# Allegro board QNET1.brd
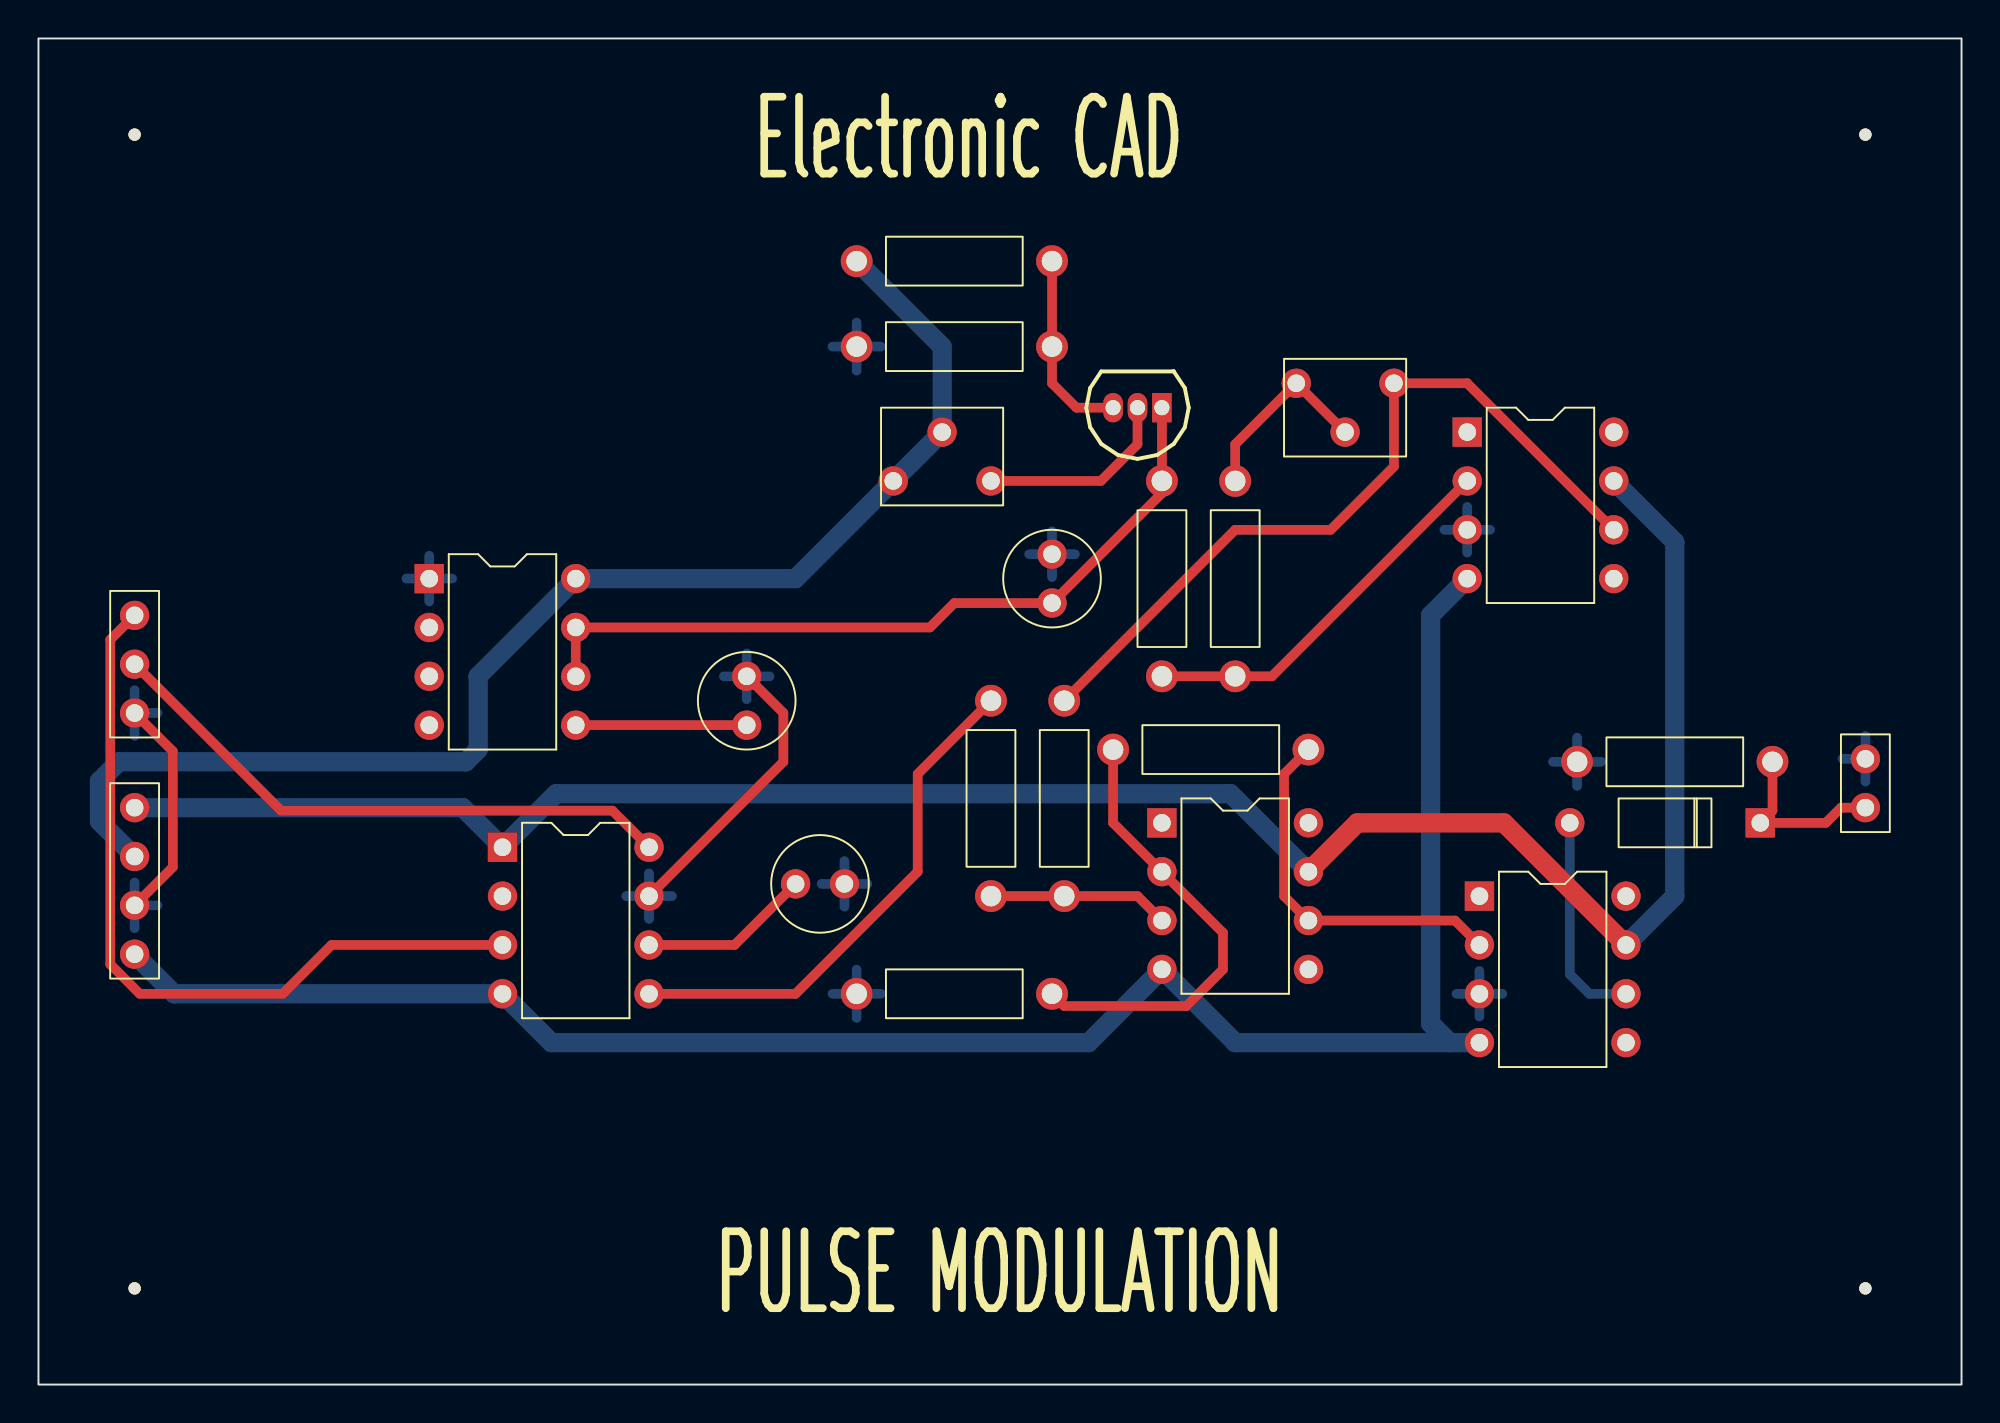
[diagram p0: board, top side]
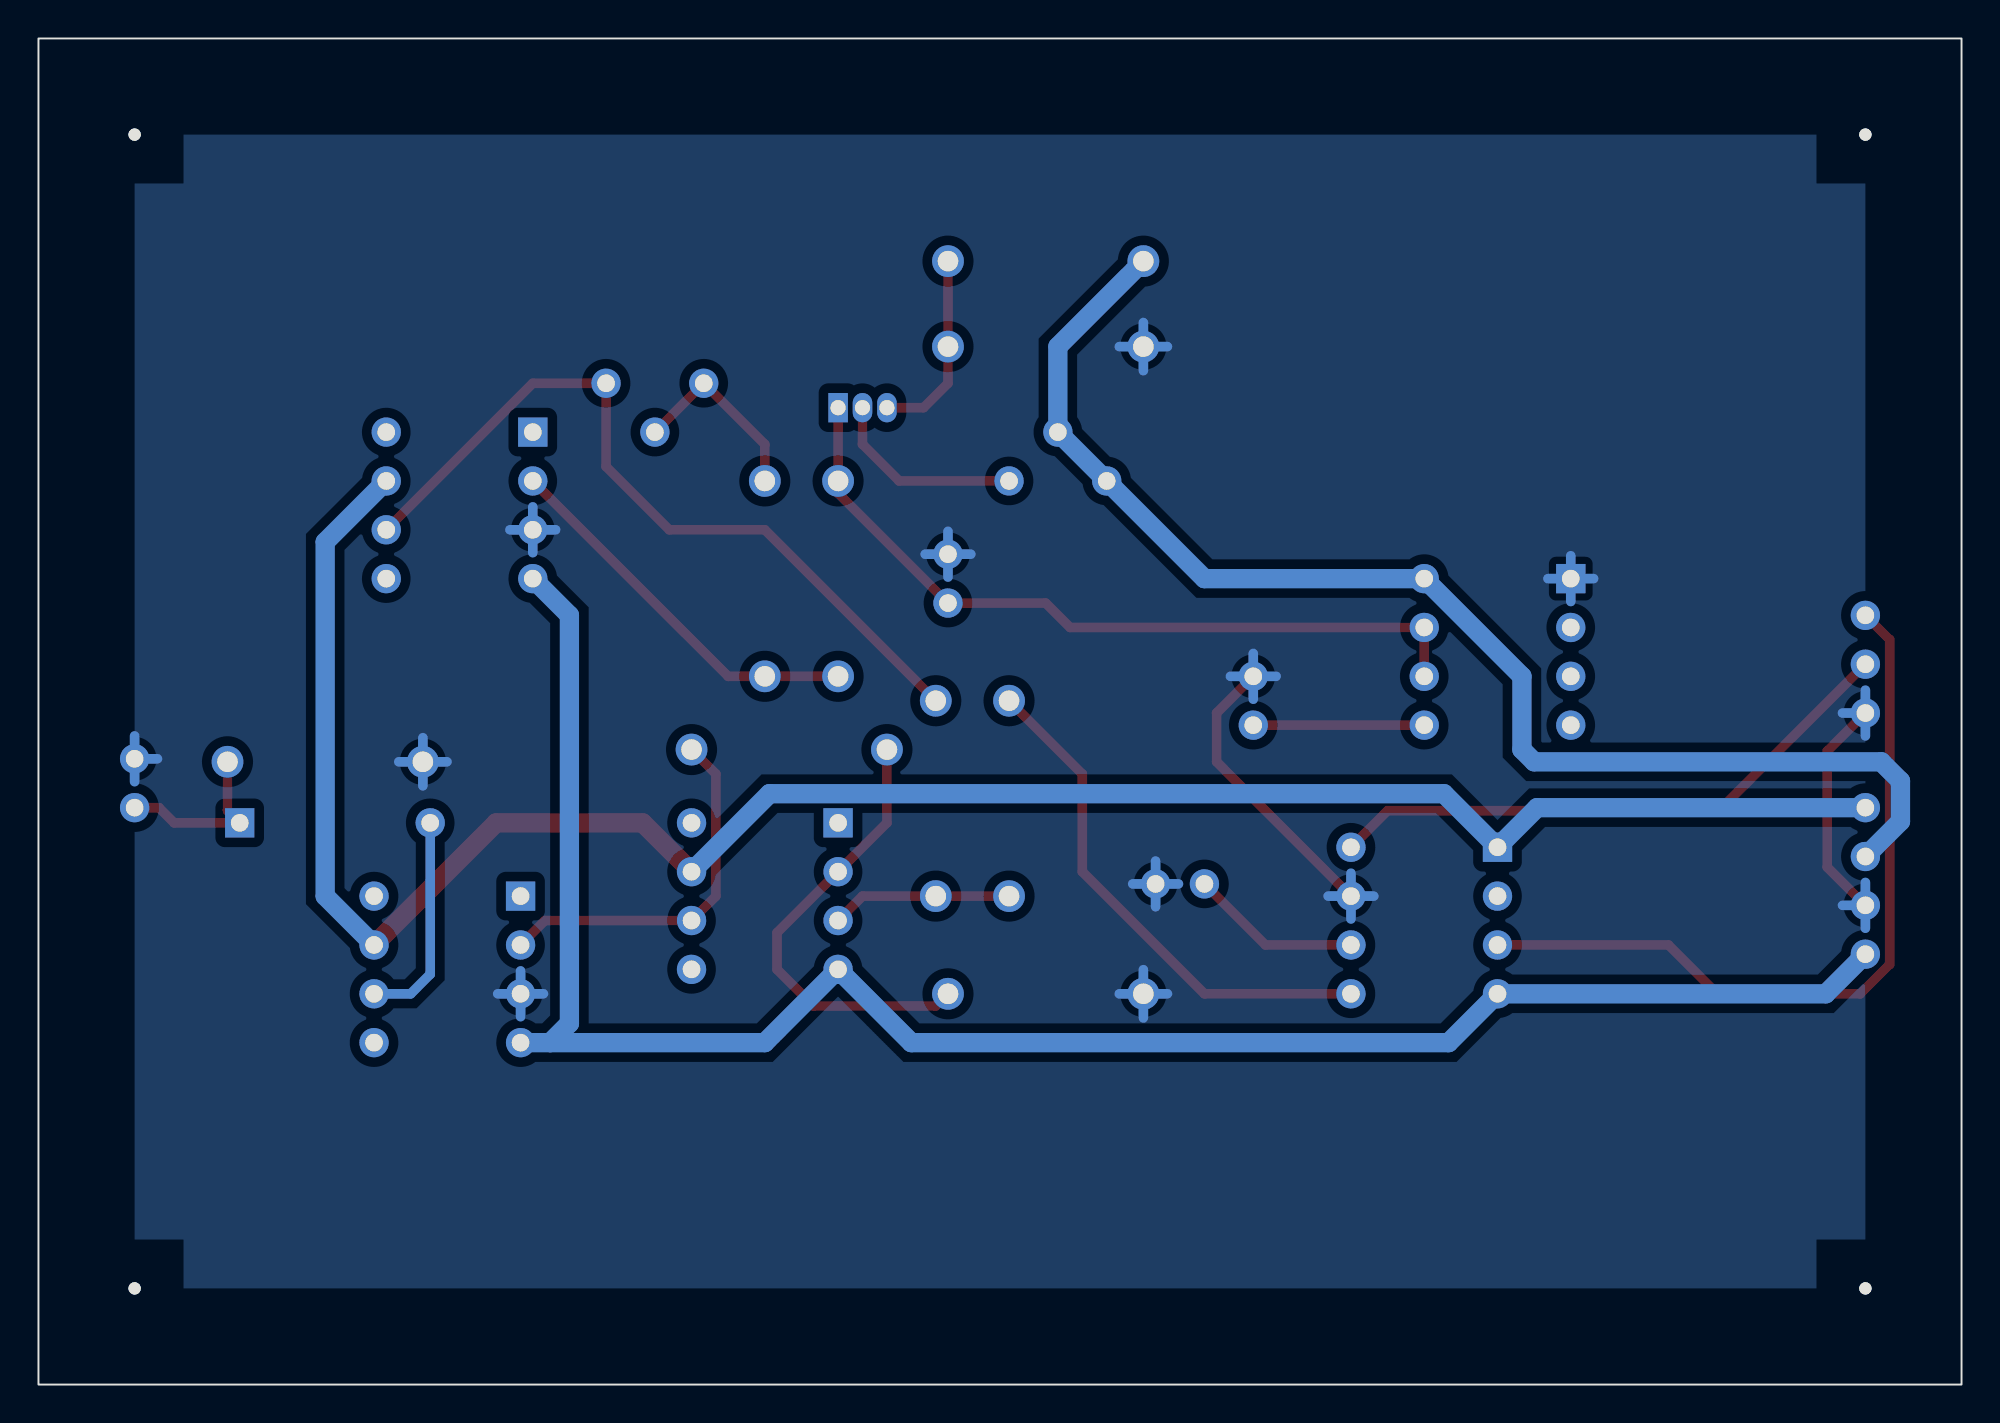
[diagram p1: board, bottom side, seen from below]

Outline 100 x 70 mm; copper layers: TOP, BOTTOM. Coordinates in mm from the lower left corner of the outline.
Outline path: rectangle 0,0 100,70

## Design rules (mm)
constraint set DEFAULT: min track width 0.5
nets with their own width: min track width 1; nets +5V +15V -15V

## Placement (name value [footprint] x y rotation side)
C1  0.01uF  [CAP196]  52.7 40.64 0 top
C2  0.01uF  [CAP196]  36.83 34.29 0 top
C3  0.01uF  [CAP196]  39.37 26.04 270 top
D1  DIODE  [DO41]  89.53 29.21 90 top
J1  CON4  [JUMPER4]  5 30 270 top
J2  CON3  [JUMPER3]  5 40 270 top
J3  CON2  [JUMPER2]  95 30 90 top
NOREF  -  [unnamed]  5 5 0 top
NOREF#2  -  [#2]  -1 0 90 top
NOREF#3  -  [#2]  100 0 90 top
NOREF#4  -  [#2]  0 71 0 top
NOREF#5  -  [unnamed]  5 65 0 top
NOREF#6  -  [unnamed]  95 5 0 top
NOREF#7  -  [unnamed]  95 65 0 top
Q1  2SA1020  [TO92]  58.42 50.8 180 top
R1  560  [RES400]  62.23 36.83 0 top
R2  39K  [RES400]  42.55 58.42 270 top
R3  6.2K  [RES400]  58.42 46.99 180 top
R4  100K  [RES400]  52.7 53.98 90 top
R5  10K  [RES400]  53.34 35.56 180 top
R6  10K  [RES400]  55.88 33.02 270 top
R7  10K  [RES400]  49.53 35.56 180 top
R8  10K  [RES400]  52.7 20.32 90 top
R9  10K  [RES400]  90.17 32.38 90 top
U1  NE555  [DIP8_3]  20.32 41.91 0 top
U2  LF356  [DIP8_3]  74.3 49.53 0 top
U3  LF398  [DIP8_3]  24.13 27.94 0 top
U4  LF356  [DIP8_3]  58.42 29.21 0 top
U5  LF356  [DIP8_3]  74.93 25.4 0 top
VR1  5K  [RESADJ]  49.53 46.99 270 top
VR2  20K  [RESADJ]  65.41 52.07 90 top

## Library data of the parts
C1-C3 = CAP NP: Tolerance: ***; User Part Number: ***
D1 = DIODE
J1 = CON4: User Part Number: ***
J2 = CON3: User Part Number: ***
J3 = CON2: User Part Number: ***
Q1 = 2SA1020
R1-R9 = R: Tolerance: ***; User Part Number: ***
U1 = NE555_6: Tolerance: ***; User Part Number: ***
U2 U4 U5 = LF356_0: Tolerance: ***; User Part Number: ***
U3 = LF398_0: Tolerance: ***; User Part Number: ***
VR1 VR2 = POT: Tolerance: ***; User Part Number: ***

## Footprints (pads in the part's own frame, mm; a bottom-side part is the same pattern mirrored in y, then rotated)
CAP196
  round 1.524 hole 0.914: 1(0,0) 2(0,2.54)
DIP8_3
  rect 1.524x1.524 hole 0.914: 1(0,0)
  round 1.524 hole 0.914: 2(0,-2.54) 3(0,-5.08) 4(0,-7.62) 5(7.62,-7.62) 6(7.62,-5.08) 7(7.62,-2.54) 8(7.62,0)
DO41
  rect 1.524x1.524 hole 0.914: 1(0,0)
  round 1.524 hole 0.914: 2(0,9.906)
JUMPER2
  round 1.524 hole 0.914: 1(0,0) 2(2.54,0)
JUMPER3
  round 1.524 hole 0.914: 1(0,0) 2(2.54,0) 3(5.08,0)
JUMPER4
  round 1.524 hole 0.914: 1(0,0) 2(2.54,0) 3(5.08,0) 4(7.62,0)
RES400
  round 1.651 hole 1.067: 1(0,0) 2(0,10.16)
RESADJ
  round 1.524 hole 0.914: 1(0,0) 2(-2.54,-2.54) 3(0,-5.08)
TO92
  rect 1.016x1.524 hole 0.787: 1(0,0)
  oval 1.016x1.524 hole 0.787: 2(1.27,0) 3(2.54,0)
unnamed
  round 0.635 hole 3.175 unplated: (0,0)

## Nets
+5V: J1.2 R2.1 U1.8(VCC) VR1.2(WIPER) VR1.3
+15V: J1.1 U2.7 U3.1 U4.7 U5.7
-15V: J1.4 U2.4(V-) U3.4(V-) U4.4(V-) U5.4(V-)
GND: C1.2 C2.2 C3.2 J1.3 J2.3 J3.2 R4.2 R8.2 R9.2 U1.1 U2.3 U3.7 U5.3
CLOCK: U1.2
SIG_1: R5.1 U2.6 VR2.3
N01013: C1.1 Q1.1(E) R3.1 U1.6 U1.7
N01032: C2.1 U1.5
N01351: Q1.3 R2.2 R4.1
N01724: R1.1 R3.2 U2.2
N02864: J2.1 U3.3
N02879: J2.2 U3.8
N03045: C3.1 U3.6
N03266: R7.1 U3.5
N03270: R5.2 R7.2 U4.3
N03305: R6.1 R8.1 U4.2
N03554: R6.2 U4.6 U5.2
N03734: D1.2 U5.6
N03738: D1.1(K) J3.1 R9.1
N04124: Q1.2 VR1.1
N04258: R1.2 VR2.1 VR2.2(WIPER)

Pads without a net: U1 3 4; U2 1 5 8; U3 2; U4 1 5 8; U5 1 5 8

## Routing (per net, layer and track width the routed paths; a pad name or vN(x,y) marks a point on that pad's centre or on a via; arc(x,y) is an arc through that point)
+5V: length 69
  BOTTOM w1: R2.1 46.99,53.98 VR1.2 VR1.3 39.37,41.91 U1.8 22.86,36.83 22.86,33.02 22.23,32.38 4.17,32.38 3.17,31.39 3.17,29.29 J1.2
+15V: length 111.4
  TOP w1: U4.7 68.58,29.21 76.2,29.21 U5.7
  BOTTOM w1: U2.7 85.09,43.81 85.09,25.4 U5.7 ; J1.1 22.07,30 U3.1 26.92,30.73 61.98,30.73 U4.7
-15V: length 100.3
  BOTTOM w1: J1.4 7.06,20.32 U3.4 26.67,17.78 54.61,17.78 U4.4 62.23,17.78 73.39,17.78 ; U5.4 73.39,17.78 ; 73.39,17.78 72.39,18.78 72.39,40.01 U2.4
GND: length 85.7
  TOP w0.5: U3.7 38.73,32.38 38.73,34.92 C2.2 ; J1.3 6.99,26.91 6.99,32.94 J2.3
  BOTTOM w0.5: 73.11,44.45 U2.3 ; U2.3 74.3,43.26 ; U2.3 75.48,44.45 ; U2.3 74.3,45.64 ; 42.55,19.07 R8.2 ; R8.2 42.55,21.57 ; R8.2 41.29,20.32 ; R8.2 43.8,20.32 ; 73.74,20.32 U5.3 ; U5.3 74.93,21.51 ; U5.3 76.12,20.32 ; U5.3 74.93,19.13 ; J2.3 6.19,34.92 ; J2.3 5,36.11 ; J2.3 5,33.73 ; C2.2 38.02,36.83 ; C2.2 36.83,38.02 ; C2.2 36.83,35.64 ; C2.2 35.64,36.83 ; 41.29,53.98 R4.2 ; R4.2 42.55,52.72 ; R4.2 42.55,55.23 ; R4.2 43.8,53.98 ; 93.81,32.54 J3.2 ; J3.2 95,31.35 ; J3.2 95,33.73 ; 31.75,24.21 U3.7 ; U3.7 32.94,25.4 ; U3.7 31.75,26.59 ; U3.7 30.56,25.4 ; U1.1 20.32,43.1 ; U1.1 21.51,41.91 ; U1.1 19.13,41.91 ; U1.1 20.32,40.72 ; C1.2 52.7,44.37 ; C1.2 53.89,43.18 ; C1.2 51.52,43.18 ; C1.2 52.7,41.99 ; C3.2 41.91,27.22 ; C3.2 41.91,24.85 ; C3.2 43.1,26.04 ; C3.2 40.72,26.04 ; J1.3 6.19,24.92 ; J1.3 5,23.73 ; J1.3 5,26.11 ; 80.01,31.13 R9.2 ; R9.2 80.01,33.64 ; R9.2 78.76,32.38 ; R9.2 81.26,32.38
SIG_1: length 41.1
  TOP w0.5: R5.1 62.23,44.45 67.2,44.45 70.48,47.74 VR2.3 74.3,52.07 U2.6
N01013: length 40.4
  TOP w0.5: U1.6 U1.7 46.35,39.37 47.62,40.64 C1.1 58.42,46.35 R3.1 Q1.1
N01032: length 8.9
  TOP w0.5: U1.5 C2.1
N01351: length 10.1
  TOP w0.5: R2.2 R4.1 52.7,52.07 53.97,50.8 Q1.3
N01724: length 20.1
  TOP w0.5: R3.2 R1.1 64.14,36.83 U2.2
N02864: length 40.8
  TOP w0.5: J2.1 3.73,38.73 3.73,21.86 5.27,20.32 12.7,20.32 15.24,22.86 U3.3
N02879: length 30.7
  TOP w0.5: U3.8 29.84,29.84 12.62,29.84 J2.2
N03045: length 8.9
  TOP w0.5: C3.1 39.37,26.03 36.2,22.86 U3.6
N03266: length 27.1
  TOP w0.5: U3.5 39.37,20.32 45.72,26.67 45.72,31.75 R7.1
N03270: length 9.4
  TOP w0.5: U4.3 57.15,25.4 R5.2 R7.2
N03305: length 23.7
  TOP w0.5: R8.1 53.34,19.68 59.69,19.68 61.59,21.59 61.59,23.5 U4.2 55.88,29.21 R6.1
N03554: length 19.4
  TOP w0.5: U5.2 73.66,24.13 U4.6 64.77,25.4 64.77,31.75 R6.2
N03734: length 11.2
  BOTTOM w0.5: U5.6 80.64,20.32 79.63,21.34 D1.2
N03738: length 9.2
  TOP w0.5: R9.1 90.17,29.84 D1.1 92.94,29.21 93.73,30 J3.1
N04124: length 10.3
  TOP w0.5: Q1.2 57.15,48.9 55.24,46.99 VR1.1
N04258: length 10
  TOP w0.5: R1.2 62.23,48.9 VR2.1 67.94,49.53

## Copper pours and planes (outline as drawn; the poured copper is in the pictures)
GND on BOTTOM: 5,5 5,65 95,65 95,5

## Text on the board
Ref Des/Silkscreen Top: PULSE MODULATION | Electronic CAD
DIMENSION: FIGURE | FINISHED_SIZE | 0.787 | 0.914 | 1.067 | 3.175 | DRILL CHART: TOP to BOTTOM | ALL UNITS ARE IN MILLIMETERS | PLATED | NON-PLATED | QTY | 3 | 63 | 18 | 4
